# EAGLE board RTC-Module-Panel (EAGLE 7.7.0)
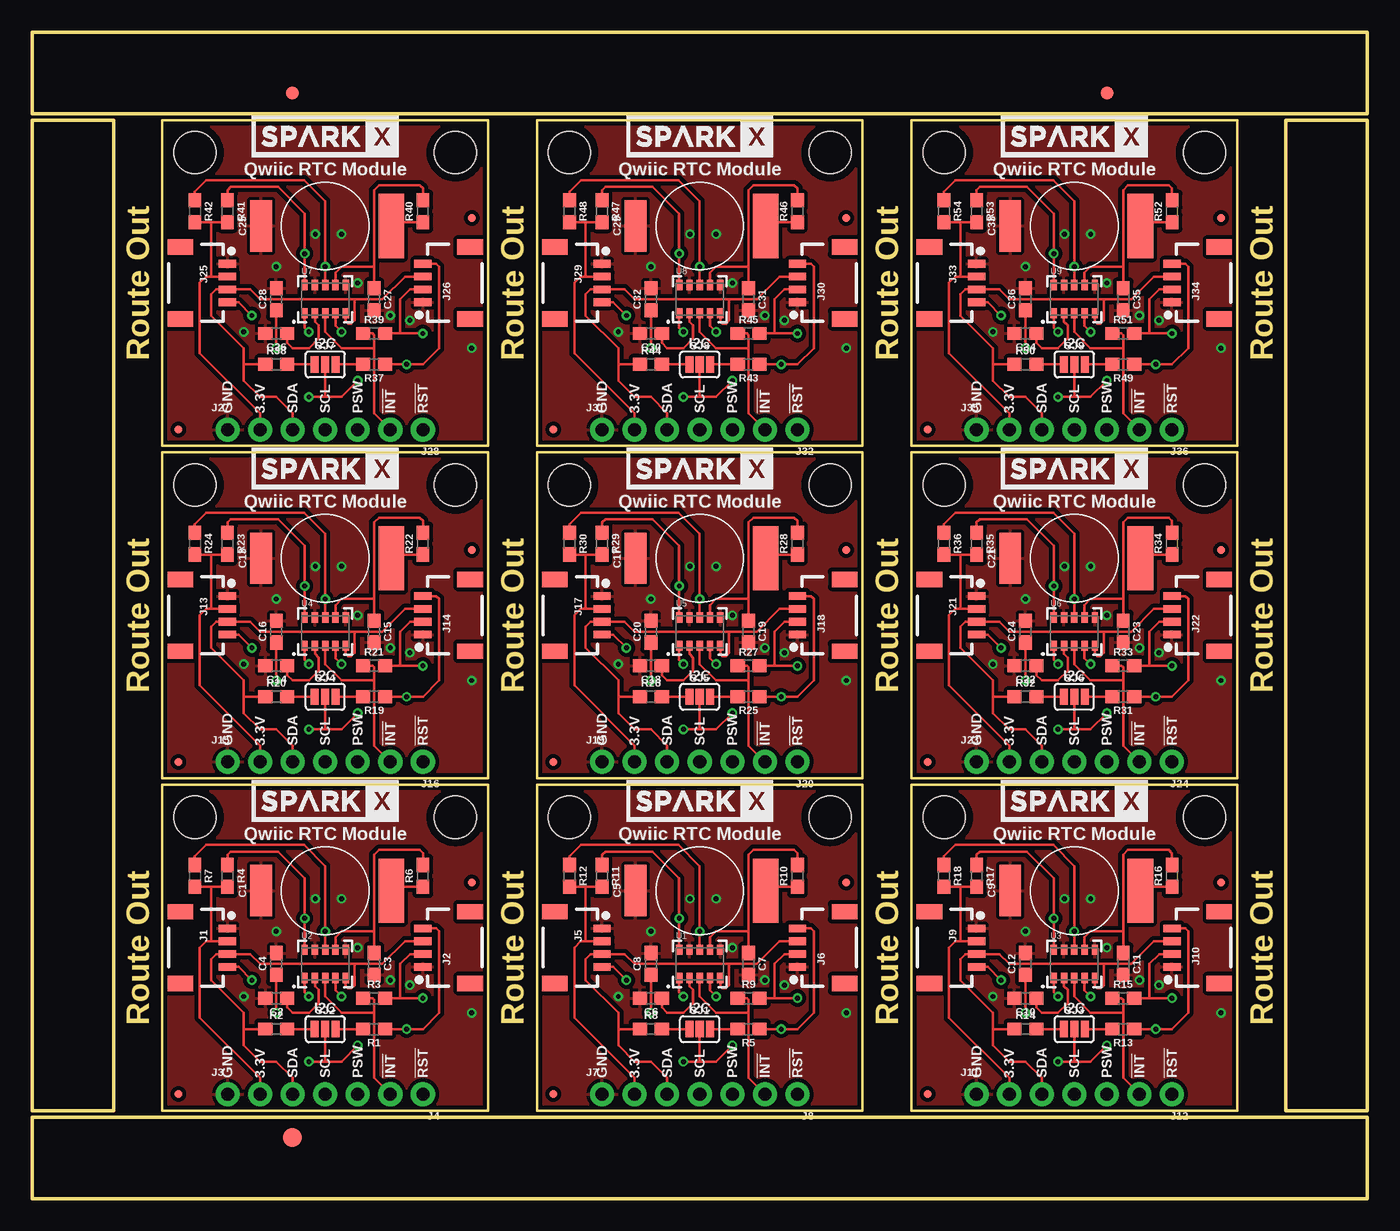
[diagram p0: board, top side]
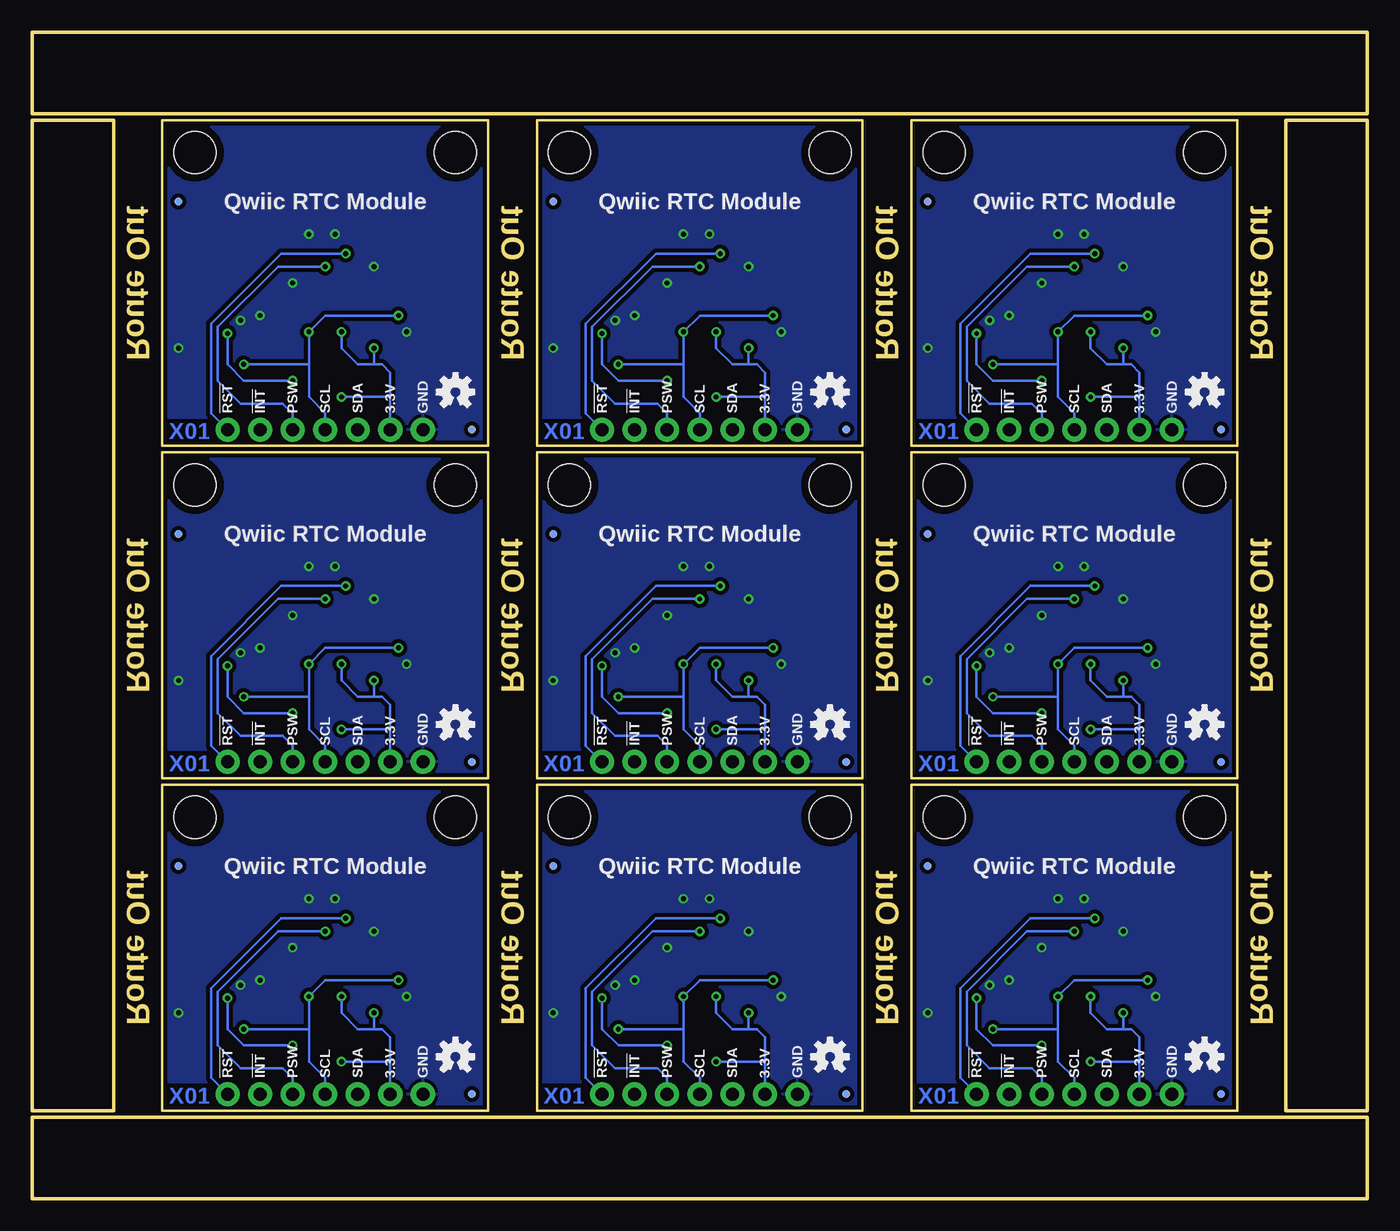
[diagram p1: board, bottom side, seen from below]

Size 104.14 x 90.93 mm. Coordinates in mm from the lower left corner, seen from the top.
Outline: 35.56,32.26 10.16,32.26 10.16,6.86 35.56,6.86 35.56,32.26
Outline: 64.77,32.26 39.37,32.26 39.37,6.86 64.77,6.86 64.77,32.26
Outline: 93.98,32.26 68.58,32.26 68.58,6.86 93.98,6.86 93.98,32.26
Outline: 35.56,58.17 10.16,58.17 10.16,32.77 35.56,32.77 35.56,58.17
Outline: 64.77,58.17 39.37,58.17 39.37,32.77 64.77,32.77 64.77,58.17
Outline: 93.98,58.17 68.58,58.17 68.58,32.77 93.98,32.77 93.98,58.17
Outline: 35.56,84.07 10.16,84.07 10.16,58.67 35.56,58.67 35.56,84.07
Outline: 64.77,84.07 39.37,84.07 39.37,58.67 64.77,58.67 64.77,84.07
Outline: 93.98,84.07 68.58,84.07 68.58,58.67 93.98,58.67 93.98,84.07
Outline: 0,6.35 104.14,6.35 104.14,0 0,0 0,6.35
Outline: 97.79,84.07 104.14,84.07 104.14,6.86 97.79,6.86 97.79,84.07
Outline: 0,90.93 104.14,90.93 104.14,84.58 0,84.58 0,90.93
Outline: 0,84.07 6.35,84.07 6.35,6.86 0,6.86 0,84.07
Copper layers (1*16): Top 0.035mm / dielectric 1.5mm / Bottom 0.035mm
Design rules "SparkFun-2-layer-PCBWay-LIMIT": minimum track width 6mil, minimum drill 0.3mm, track to track 6mil, track to pad 6mil, pad to pad 6mil, via to via 6mil, smd to smd 6mil, copper to edge 6mil, drill to drill 6mil, minimum pad ring 7mil, minimum via ring 7mil, stop-mask expansion 4mil, vias tented up to drill 25mil, thermal gap 10mil

## Footprints (pad centres in the part's own frame; a part is rotated, then mirrored left to right if it is on the bottom)
DSK-RADIAL-6.8MM = smd 5 x 2: + 0,5.15 | smd 4 x 1.7: - 0,-5
0603 = smd 1.1 x 1: 1 -0.85,0; 2 0.85,0
FIDUCIAL-1X2 = smd 1 x 1: 1 0,0
FIDUCIAL-1.5X3 = smd 1.5 x 1.5: 1 0,0
FIDUCIAL-MICRO = smd 0.635 x 0.635: 1 0,0
1X04_1MM_RA = smd 0.6 x 1.35: 1 -1.5,0; 2 -0.5,0; 3 0.5,0; 4 1.5,0 | smd 1.2 x 2: NC1 2.8,-3.675; NC2 -2.8,-3.675
1X04_NO_SILK = drill 1.016 pad 1.88: 1 0,0; 2 2.54,0; 3 5.08,0; 4 7.62,0
1X03_NO_SILK = drill 1.016 pad 1.88: 1 0,0; 2 2.54,0; 3 5.08,0
SMT-JUMPER_3_2-NC_PASTE_SILK = smd 0.635 x 1.27: 1 -0.813,0; 2 0,0; 3 0.813,0
RV-1805 = smd 0.5 x 0.8: 1 -1.6,-1.1; 2 -0.8,-1.1; 3 0,-1.1; 4 0.8,-1.1; 5 1.6,-1.1; 6 1.6,1.1; 7 0.8,1.1; 8 0,1.1; 9 -0.8,1.1; 10 -1.6,1.1 | smd 0 x 0: 11 0,0
STAND-OFF = hole 3.302: 0,0

## Placement (x,y rotation side)
C1  .22F-SUPERCAP  [DSK-RADIAL-6.8MM]  22.86,24 270 top
C2  47pF  [0603]  19.05,15.62 180 top
C3  10nF  [0603]  26.67,18.29 270 top
C4  10nF  [0603]  19.05,18.29 90 top
C5  .22F-SUPERCAP  [DSK-RADIAL-6.8MM]  52.07,24 270 top
C6  47pF  [0603]  48.26,15.62 180 top
C7  10nF  [0603]  55.88,18.29 270 top
C8  10nF  [0603]  48.26,18.29 90 top
C9  .22F-SUPERCAP  [DSK-RADIAL-6.8MM]  81.28,24 270 top
C10  47pF  [0603]  77.47,15.62 180 top
C11  10nF  [0603]  85.09,18.29 270 top
C12  10nF  [0603]  77.47,18.29 90 top
C13  .22F-SUPERCAP  [DSK-RADIAL-6.8MM]  22.86,49.91 270 top
C14  47pF  [0603]  19.05,41.53 180 top
C15  10nF  [0603]  26.67,44.2 270 top
C16  10nF  [0603]  19.05,44.2 90 top
C17  .22F-SUPERCAP  [DSK-RADIAL-6.8MM]  52.07,49.91 270 top
C18  47pF  [0603]  48.26,41.53 180 top
C19  10nF  [0603]  55.88,44.2 270 top
C20  10nF  [0603]  48.26,44.2 90 top
C21  .22F-SUPERCAP  [DSK-RADIAL-6.8MM]  81.28,49.91 270 top
C22  47pF  [0603]  77.47,41.53 180 top
C23  10nF  [0603]  85.09,44.2 270 top
C24  10nF  [0603]  77.47,44.2 90 top
C25  .22F-SUPERCAP  [DSK-RADIAL-6.8MM]  22.86,75.82 270 top
C26  47pF  [0603]  19.05,67.44 180 top
C27  10nF  [0603]  26.67,70.1 270 top
C28  10nF  [0603]  19.05,70.1 90 top
C29  .22F-SUPERCAP  [DSK-RADIAL-6.8MM]  52.07,75.82 270 top
C30  47pF  [0603]  48.26,67.44 180 top
C31  10nF  [0603]  55.88,70.1 270 top
C32  10nF  [0603]  48.26,70.1 90 top
C33  .22F-SUPERCAP  [DSK-RADIAL-6.8MM]  81.28,75.82 270 top
C34  47pF  [0603]  77.47,67.44 180 top
C35  10nF  [0603]  85.09,70.1 270 top
C36  10nF  [0603]  77.47,70.1 90 top
E$1  [FIDUCIAL-1X2]  20.32,86.17 0 top
E$2  [FIDUCIAL-1X2]  83.82,86.17 0 top
E$3  [FIDUCIAL-1.5X3]  20.32,4.76 0 top
FD1  FIDUCIALUFIDUCIAL  [FIDUCIAL-MICRO]  34.29,25.91 0 bottom
FD2  FIDUCIALUFIDUCIAL  [FIDUCIAL-MICRO]  34.29,24.64 0 top
FD3  FIDUCIALUFIDUCIAL  [FIDUCIAL-MICRO]  11.43,8.13 0 bottom
FD4  FIDUCIALUFIDUCIAL  [FIDUCIAL-MICRO]  11.43,8.13 0 top
FD5  FIDUCIALUFIDUCIAL  [FIDUCIAL-MICRO]  63.5,25.91 0 bottom
FD6  FIDUCIALUFIDUCIAL  [FIDUCIAL-MICRO]  63.5,24.64 0 top
FD7  FIDUCIALUFIDUCIAL  [FIDUCIAL-MICRO]  40.64,8.13 0 bottom
FD8  FIDUCIALUFIDUCIAL  [FIDUCIAL-MICRO]  40.64,8.13 0 top
FD9  FIDUCIALUFIDUCIAL  [FIDUCIAL-MICRO]  92.71,25.91 0 bottom
FD10  FIDUCIALUFIDUCIAL  [FIDUCIAL-MICRO]  92.71,24.64 0 top
FD11  FIDUCIALUFIDUCIAL  [FIDUCIAL-MICRO]  69.85,8.13 0 bottom
FD12  FIDUCIALUFIDUCIAL  [FIDUCIAL-MICRO]  69.85,8.13 0 top
FD13  FIDUCIALUFIDUCIAL  [FIDUCIAL-MICRO]  34.29,51.82 0 bottom
FD14  FIDUCIALUFIDUCIAL  [FIDUCIAL-MICRO]  34.29,50.55 0 top
FD15  FIDUCIALUFIDUCIAL  [FIDUCIAL-MICRO]  11.43,34.04 0 bottom
FD16  FIDUCIALUFIDUCIAL  [FIDUCIAL-MICRO]  11.43,34.04 0 top
FD17  FIDUCIALUFIDUCIAL  [FIDUCIAL-MICRO]  63.5,51.82 0 bottom
FD18  FIDUCIALUFIDUCIAL  [FIDUCIAL-MICRO]  63.5,50.55 0 top
FD19  FIDUCIALUFIDUCIAL  [FIDUCIAL-MICRO]  40.64,34.04 0 bottom
FD20  FIDUCIALUFIDUCIAL  [FIDUCIAL-MICRO]  40.64,34.04 0 top
FD21  FIDUCIALUFIDUCIAL  [FIDUCIAL-MICRO]  92.71,51.82 0 bottom
FD22  FIDUCIALUFIDUCIAL  [FIDUCIAL-MICRO]  92.71,50.55 0 top
FD23  FIDUCIALUFIDUCIAL  [FIDUCIAL-MICRO]  69.85,34.04 0 bottom
FD24  FIDUCIALUFIDUCIAL  [FIDUCIAL-MICRO]  69.85,34.04 0 top
FD25  FIDUCIALUFIDUCIAL  [FIDUCIAL-MICRO]  34.29,77.72 0 bottom
FD26  FIDUCIALUFIDUCIAL  [FIDUCIAL-MICRO]  34.29,76.45 0 top
FD27  FIDUCIALUFIDUCIAL  [FIDUCIAL-MICRO]  11.43,59.94 0 bottom
FD28  FIDUCIALUFIDUCIAL  [FIDUCIAL-MICRO]  11.43,59.94 0 top
FD29  FIDUCIALUFIDUCIAL  [FIDUCIAL-MICRO]  63.5,77.72 0 bottom
FD30  FIDUCIALUFIDUCIAL  [FIDUCIAL-MICRO]  63.5,76.45 0 top
FD31  FIDUCIALUFIDUCIAL  [FIDUCIAL-MICRO]  40.64,59.94 0 bottom
FD32  FIDUCIALUFIDUCIAL  [FIDUCIAL-MICRO]  40.64,59.94 0 top
FD33  FIDUCIALUFIDUCIAL  [FIDUCIAL-MICRO]  92.71,77.72 0 bottom
FD34  FIDUCIALUFIDUCIAL  [FIDUCIAL-MICRO]  92.71,76.45 0 top
FD35  FIDUCIALUFIDUCIAL  [FIDUCIAL-MICRO]  69.85,59.94 0 bottom
FD36  FIDUCIALUFIDUCIAL  [FIDUCIAL-MICRO]  69.85,59.94 0 top
J1  SMD  [1X04_1MM_RA]  15.24,19.56 270 top
J2  SMD  [1X04_1MM_RA]  30.48,19.56 90 top
J3  PTH  [1X04_NO_SILK]  15.24,8.13 0 top
J4  [1X03_NO_SILK]  30.48,8.13 180 top
J5  SMD  [1X04_1MM_RA]  44.45,19.56 270 top
J6  SMD  [1X04_1MM_RA]  59.69,19.56 90 top
J7  PTH  [1X04_NO_SILK]  44.45,8.13 0 top
J8  [1X03_NO_SILK]  59.69,8.13 180 top
J9  SMD  [1X04_1MM_RA]  73.66,19.56 270 top
J10  SMD  [1X04_1MM_RA]  88.9,19.56 90 top
J11  PTH  [1X04_NO_SILK]  73.66,8.13 0 top
J12  [1X03_NO_SILK]  88.9,8.13 180 top
J13  SMD  [1X04_1MM_RA]  15.24,45.47 270 top
J14  SMD  [1X04_1MM_RA]  30.48,45.47 90 top
J15  PTH  [1X04_NO_SILK]  15.24,34.04 0 top
J16  [1X03_NO_SILK]  30.48,34.04 180 top
J17  SMD  [1X04_1MM_RA]  44.45,45.47 270 top
J18  SMD  [1X04_1MM_RA]  59.69,45.47 90 top
J19  PTH  [1X04_NO_SILK]  44.45,34.04 0 top
J20  [1X03_NO_SILK]  59.69,34.04 180 top
J21  SMD  [1X04_1MM_RA]  73.66,45.47 270 top
J22  SMD  [1X04_1MM_RA]  88.9,45.47 90 top
J23  PTH  [1X04_NO_SILK]  73.66,34.04 0 top
J24  [1X03_NO_SILK]  88.9,34.04 180 top
J25  SMD  [1X04_1MM_RA]  15.24,71.37 270 top
J26  SMD  [1X04_1MM_RA]  30.48,71.37 90 top
J27  PTH  [1X04_NO_SILK]  15.24,59.94 0 top
J28  [1X03_NO_SILK]  30.48,59.94 180 top
J29  SMD  [1X04_1MM_RA]  44.45,71.37 270 top
J30  SMD  [1X04_1MM_RA]  59.69,71.37 90 top
J31  PTH  [1X04_NO_SILK]  44.45,59.94 0 top
J32  [1X03_NO_SILK]  59.69,59.94 180 top
J33  SMD  [1X04_1MM_RA]  73.66,71.37 270 top
J34  SMD  [1X04_1MM_RA]  88.9,71.37 90 top
J35  PTH  [1X04_NO_SILK]  73.66,59.94 0 top
J36  [1X03_NO_SILK]  88.9,59.94 180 top
LOGO1  OSHW-LOGOS  [OSHW-LOGO-S]  12.7,11.05 0 bottom
LOGO2  OSHW-LOGOS  [OSHW-LOGO-S]  41.91,11.05 0 bottom
LOGO3  OSHW-LOGOS  [OSHW-LOGO-S]  71.12,11.05 0 bottom
LOGO4  OSHW-LOGOS  [OSHW-LOGO-S]  12.7,36.96 0 bottom
LOGO5  OSHW-LOGOS  [OSHW-LOGO-S]  41.91,36.96 0 bottom
LOGO6  OSHW-LOGOS  [OSHW-LOGO-S]  71.12,36.96 0 bottom
LOGO7  OSHW-LOGOS  [OSHW-LOGO-S]  12.7,62.86 0 bottom
LOGO8  OSHW-LOGOS  [OSHW-LOGO-S]  41.91,62.86 0 bottom
LOGO9  OSHW-LOGOS  [OSHW-LOGO-S]  71.12,62.86 0 bottom
R1  2.2k  [0603]  26.67,13.21 180 top
R2  2.2k  [0603]  19.05,13.21 0 top
R3  10k  [0603]  26.67,15.62 0 top
R4  10k  [0603]  15.24,25.15 270 top
R5  2.2k  [0603]  55.88,13.21 180 top
R6  1K  [0603]  30.48,25.15 90 top
R7  10k  [0603]  12.7,25.15 270 top
R8  2.2k  [0603]  48.26,13.21 0 top
R9  10k  [0603]  55.88,15.62 0 top
R10  1K  [0603]  59.69,25.15 90 top
R11  10k  [0603]  44.45,25.15 270 top
R12  10k  [0603]  41.91,25.15 270 top
R13  2.2k  [0603]  85.09,13.21 180 top
R14  2.2k  [0603]  77.47,13.21 0 top
R15  10k  [0603]  85.09,15.62 0 top
R16  1K  [0603]  88.9,25.15 90 top
R17  10k  [0603]  73.66,25.15 270 top
R18  10k  [0603]  71.12,25.15 270 top
R19  2.2k  [0603]  26.67,39.12 180 top
R20  2.2k  [0603]  19.05,39.12 0 top
R21  10k  [0603]  26.67,41.53 0 top
R22  1K  [0603]  30.48,51.05 90 top
R23  10k  [0603]  15.24,51.05 270 top
R24  10k  [0603]  12.7,51.05 270 top
R25  2.2k  [0603]  55.88,39.12 180 top
R26  2.2k  [0603]  48.26,39.12 0 top
R27  10k  [0603]  55.88,41.53 0 top
R28  1K  [0603]  59.69,51.05 90 top
R29  10k  [0603]  44.45,51.05 270 top
R30  10k  [0603]  41.91,51.05 270 top
R31  2.2k  [0603]  85.09,39.12 180 top
R32  2.2k  [0603]  77.47,39.12 0 top
R33  10k  [0603]  85.09,41.53 0 top
R34  1K  [0603]  88.9,51.05 90 top
R35  10k  [0603]  73.66,51.05 270 top
R36  10k  [0603]  71.12,51.05 270 top
R37  2.2k  [0603]  26.67,65.02 180 top
R38  2.2k  [0603]  19.05,65.02 0 top
R39  10k  [0603]  26.67,67.44 0 top
R40  1K  [0603]  30.48,76.96 90 top
R41  10k  [0603]  15.24,76.96 270 top
R42  10k  [0603]  12.7,76.96 270 top
R43  2.2k  [0603]  55.88,65.02 180 top
R44  2.2k  [0603]  48.26,65.02 0 top
R45  10k  [0603]  55.88,67.44 0 top
R46  1K  [0603]  59.69,76.96 90 top
R47  10k  [0603]  44.45,76.96 270 top
R48  10k  [0603]  41.91,76.96 270 top
R49  2.2k  [0603]  85.09,65.02 180 top
R50  2.2k  [0603]  77.47,65.02 0 top
R51  10k  [0603]  85.09,67.44 0 top
R52  1K  [0603]  88.9,76.96 90 top
R53  10k  [0603]  73.66,76.96 270 top
R54  10k  [0603]  71.12,76.96 270 top
SJ1  JUMPER-SMT_3_2-NC_PASTE_SILK  [SMT-JUMPER_3_2-NC_PASTE_SILK]  52.07,13.21 0 top
SJ2  JUMPER-SMT_3_2-NC_PASTE_SILK  [SMT-JUMPER_3_2-NC_PASTE_SILK]  22.86,13.21 0 top
SJ3  JUMPER-SMT_3_2-NC_PASTE_SILK  [SMT-JUMPER_3_2-NC_PASTE_SILK]  81.28,13.21 0 top
SJ4  JUMPER-SMT_3_2-NC_PASTE_SILK  [SMT-JUMPER_3_2-NC_PASTE_SILK]  22.86,39.12 0 top
SJ5  JUMPER-SMT_3_2-NC_PASTE_SILK  [SMT-JUMPER_3_2-NC_PASTE_SILK]  52.07,39.12 0 top
SJ6  JUMPER-SMT_3_2-NC_PASTE_SILK  [SMT-JUMPER_3_2-NC_PASTE_SILK]  81.28,39.12 0 top
SJ7  JUMPER-SMT_3_2-NC_PASTE_SILK  [SMT-JUMPER_3_2-NC_PASTE_SILK]  22.86,65.02 0 top
SJ8  JUMPER-SMT_3_2-NC_PASTE_SILK  [SMT-JUMPER_3_2-NC_PASTE_SILK]  52.07,65.02 0 top
SJ9  JUMPER-SMT_3_2-NC_PASTE_SILK  [SMT-JUMPER_3_2-NC_PASTE_SILK]  81.28,65.02 0 top
U1  RV-1805  [RV-1805]  52.07,18.29 0 top
U2  RV-1805  [RV-1805]  22.86,18.29 0 top
U3  RV-1805  [RV-1805]  81.28,18.29 0 top
U4  RV-1805  [RV-1805]  22.86,44.2 0 top
U5  RV-1805  [RV-1805]  52.07,44.2 0 top
U6  RV-1805  [RV-1805]  81.28,44.2 0 top
U7  RV-1805  [RV-1805]  22.86,70.1 0 top
U8  RV-1805  [RV-1805]  52.07,70.1 0 top
U9  RV-1805  [RV-1805]  81.28,70.1 0 top
U$1  SPARKX-LOGO5  [SPARKX-LARGE]  22.86,30.99 0 top
U$2  STAND-OFF  [STAND-OFF]  62.23,29.72 180 top
U$3  STAND-OFF  [STAND-OFF]  41.91,29.72 180 top
U$4  SPARKX-LOGO5  [SPARKX-LARGE]  52.07,30.99 0 top
U$5  STAND-OFF  [STAND-OFF]  91.44,29.72 180 top
U$6  STAND-OFF  [STAND-OFF]  33.02,29.72 180 top
U$7  STAND-OFF  [STAND-OFF]  12.7,29.72 180 top
U$8  STAND-OFF  [STAND-OFF]  71.12,29.72 180 top
U$9  SPARKX-LOGO5  [SPARKX-LARGE]  81.28,30.99 0 top
U$10  STAND-OFF  [STAND-OFF]  33.02,55.63 180 top
U$11  STAND-OFF  [STAND-OFF]  12.7,55.63 180 top
U$12  SPARKX-LOGO5  [SPARKX-LARGE]  22.86,56.9 0 top
U$13  STAND-OFF  [STAND-OFF]  62.23,55.63 180 top
U$14  STAND-OFF  [STAND-OFF]  41.91,55.63 180 top
U$15  SPARKX-LOGO5  [SPARKX-LARGE]  52.07,56.9 0 top
U$16  STAND-OFF  [STAND-OFF]  91.44,55.63 180 top
U$17  STAND-OFF  [STAND-OFF]  71.12,55.63 180 top
U$18  SPARKX-LOGO5  [SPARKX-LARGE]  81.28,56.9 0 top
U$19  STAND-OFF  [STAND-OFF]  33.02,81.53 180 top
U$20  STAND-OFF  [STAND-OFF]  12.7,81.53 180 top
U$21  SPARKX-LOGO5  [SPARKX-LARGE]  22.86,82.8 0 top
U$22  STAND-OFF  [STAND-OFF]  62.23,81.53 180 top
U$23  STAND-OFF  [STAND-OFF]  41.91,81.53 180 top
U$24  SPARKX-LOGO5  [SPARKX-LARGE]  52.07,82.8 0 top
U$25  STAND-OFF  [STAND-OFF]  91.44,81.53 180 top
U$26  STAND-OFF  [STAND-OFF]  71.12,81.53 180 top
U$27  SPARKX-LOGO5  [SPARKX-LARGE]  81.28,82.8 0 top

## Library data of the parts
C1 C5 C9 C13 C17 C21 C25 C29 C33 = SparkFun-Capacitors; PROD_ID: CAP-13907
C2 C6 C10 C14 C18 C22 C26 C30 C34 = SparkFun-Capacitors; PROD_ID: CAP-08913
C3 C4 C7 C8 C11 C12 C15 C16 C19 C20 C23 C24 C27 C28 C31 C32 C35 C36 = SparkFun-Capacitors; PROD_ID: CAP-00867
E$1 E$2 FD1-FD36 LOGO1-LOGO9 = SparkFun-Aesthetics
E$3 = SparkFun-Retired
J1 J2 J5 J6 J9 J10 J13 J14 J17 J18 J21 J22 J25 J26 J29 J30 J33 J34 = SparkFun-Connectors; PROD_ID: CONN-13694
J3 J7 J11 J15 J19 J23 J27 J31 J35 = SparkFun-Connectors; PROD_ID: CONN-09696
J4 J8 J12 J16 J20 J24 J28 J32 J36 = SparkFun-Connectors
R1 R2 R5 R8 R13 R14 R19 R20 R25 R26 R31 R32 R37 R38 R43 R44 R49 R50 = SparkFun-Resistors; PROD_ID: RES-08272
R3 R4 R7 R9 R11 R12 R15 R17 R18 R21 R23 R24 R27 R29 R30 R33 R35 R36 R39 R41 R42 R45 R47 R48 R51 R53 R54 = SparkFun-Resistors; PROD_ID: RES-00824
R6 R10 R16 R22 R28 R34 R40 R46 R52 = SparkFun-Resistors; PROD_ID: RES-11227
SJ1-SJ9 = SparkFun-Jumpers
U1-U9 = SparkFun-Clocks
U$1 U$4 U$9 U$12 U$15 U$18 U$21 U$24 U$27 = SparkX
U$2 U$3 U$5-U$8 U$10 U$11 U$13 U$14 U$16 U$17 U$19 U$20 U$22 U$23 U$25 U$26 = SparkFun

## Nets
3.3V: C4.1 J1.2 J2.2 J3.2 R3.2 R4.2 R7.2 SJ2.2 U2.1
3.3V1: C8.1 J5.2 J6.2 J7.2 R9.2 R11.2 R12.2 SJ1.2 U1.1
3.3V2: C12.1 J9.2 J10.2 J11.2 R15.2 R17.2 R18.2 SJ3.2 U3.1
3.3V3: C16.1 J13.2 J14.2 J15.2 R21.2 R23.2 R24.2 SJ4.2 U4.1
3.3V4: C20.1 J17.2 J18.2 J19.2 R27.2 R29.2 R30.2 SJ5.2 U5.1
3.3V5: C24.1 J21.2 J22.2 J23.2 R33.2 R35.2 R36.2 SJ6.2 U6.1
3.3V6: C28.1 J25.2 J26.2 J27.2 R39.2 R41.2 R42.2 SJ7.2 U7.1
3.3V7: C32.1 J29.2 J30.2 J31.2 R45.2 R47.2 R48.2 SJ8.2 U8.1
3.3V8: C36.1 J33.2 J34.2 J35.2 R51.2 R53.2 R54.2 SJ9.2 U9.1
!INT: J4.2 R3.1 U2.3
!INT1: J8.2 R9.1 U1.3
!INT2: J12.2 R15.1 U3.3
!INT3: J16.2 R21.1 U4.3
!INT4: J20.2 R27.1 U5.3
!INT5: J24.2 R33.1 U6.3
!INT6: J28.2 R39.1 U7.3
!INT7: J32.2 R45.1 U8.3
!INT8: J36.2 R51.1 U9.3
!RST: J4.1 R4.1 U2.10
!RST1: J8.1 R11.1 U1.10
!RST2: J12.1 R17.1 U3.10
!RST3: J16.1 R23.1 U4.10
!RST4: J20.1 R29.1 U5.10
!RST5: J24.1 R35.1 U6.10
!RST6: J28.1 R41.1 U7.10
!RST7: J32.1 R47.1 U8.10
!RST8: J36.1 R53.1 U9.10
GND: C1.- C2.2 C3.2 C4.2 J1.1 J2.1 J3.1 U2.6 U2.9
GND1: C5.- C6.2 C7.2 C8.2 J5.1 J6.1 J7.1 U1.6 U1.9
GND2: C9.- C10.2 C11.2 C12.2 J9.1 J10.1 J11.1 U3.6 U3.9
GND3: C13.- C14.2 C15.2 C16.2 J13.1 J14.1 J15.1 U4.6 U4.9
GND4: C17.- C18.2 C19.2 C20.2 J17.1 J18.1 J19.1 U5.6 U5.9
GND5: C21.- C22.2 C23.2 C24.2 J21.1 J22.1 J23.1 U6.6 U6.9
GND6: C25.- C26.2 C27.2 C28.2 J25.1 J26.1 J27.1 U7.6 U7.9
GND7: C29.- C30.2 C31.2 C32.2 J29.1 J30.1 J31.1 U8.6 U8.9
GND8: C33.- C34.2 C35.2 C36.2 J33.1 J34.1 J35.1 U9.6 U9.9
N$1: R1.2 SJ2.3
N$2: R2.2 SJ2.1
N$3: R5.2 SJ1.3
N$4: C2.1 U2.2
N$5: C1.+ R6.1
N$6: R8.2 SJ1.1
N$7: C6.1 U1.2
N$8: C5.+ R10.1
N$9: R13.2 SJ3.3
N$10: R14.2 SJ3.1
N$11: C10.1 U3.2
N$12: C9.+ R16.1
N$13: R19.2 SJ4.3
N$14: R20.2 SJ4.1
N$15: C14.1 U4.2
N$16: C13.+ R22.1
N$17: R25.2 SJ5.3
N$18: R26.2 SJ5.1
N$19: C18.1 U5.2
N$20: C17.+ R28.1
N$21: R31.2 SJ6.3
N$22: R32.2 SJ6.1
N$23: C22.1 U6.2
N$24: C21.+ R34.1
N$25: R37.2 SJ7.3
N$26: R38.2 SJ7.1
N$27: C26.1 U7.2
N$28: C25.+ R40.1
N$29: R43.2 SJ8.3
N$30: R44.2 SJ8.1
N$31: C30.1 U8.2
N$32: C29.+ R46.1
N$33: R49.2 SJ9.3
N$34: R50.2 SJ9.1
N$35: C34.1 U9.2
N$36: C33.+ R52.1
PSW: J4.3 R7.1 U2.8
PSW1: J8.3 R12.1 U1.8
PSW2: J12.3 R18.1 U3.8
PSW3: J16.3 R24.1 U4.8
PSW4: J20.3 R30.1 U5.8
PSW5: J24.3 R36.1 U6.8
PSW6: J28.3 R42.1 U7.8
PSW7: J32.3 R48.1 U8.8
PSW8: J36.3 R54.1 U9.8
SCL: J1.4 J2.4 J3.4 R1.1 U2.4
SCL1: J5.4 J6.4 J7.4 R5.1 U1.4
SCL2: J9.4 J10.4 J11.4 R13.1 U3.4
SCL3: J13.4 J14.4 J15.4 R19.1 U4.4
SCL4: J17.4 J18.4 J19.4 R25.1 U5.4
SCL5: J21.4 J22.4 J23.4 R31.1 U6.4
SCL6: J25.4 J26.4 J27.4 R37.1 U7.4
SCL7: J29.4 J30.4 J31.4 R43.1 U8.4
SCL8: J33.4 J34.4 J35.4 R49.1 U9.4
SDA: J1.3 J2.3 J3.3 R2.1 U2.5
SDA1: J5.3 J6.3 J7.3 R8.1 U1.5
SDA2: J9.3 J10.3 J11.3 R14.1 U3.5
SDA3: J13.3 J14.3 J15.3 R20.1 U4.5
SDA4: J17.3 J18.3 J19.3 R26.1 U5.5
SDA5: J21.3 J22.3 J23.3 R32.1 U6.5
SDA6: J25.3 J26.3 J27.3 R38.1 U7.5
SDA7: J29.3 J30.3 J31.3 R44.1 U8.5
SDA8: J33.3 J34.3 J35.3 R50.1 U9.5
VBACKUP: C3.1 R6.2 U2.7
VBACKUP1: C7.1 R10.2 U1.7
VBACKUP2: C11.1 R16.2 U3.7
VBACKUP3: C15.1 R22.2 U4.7
VBACKUP4: C19.1 R28.2 U5.7
VBACKUP5: C23.1 R34.2 U6.7
VBACKUP6: C27.1 R40.2 U7.7
VBACKUP7: C31.1 R46.2 U8.7
VBACKUP8: C35.1 R52.2 U9.7

## Tracks (layer width: path | path; a pad name or v marks a point on that pad's centre or on a via)
3.3V  (via drill 0.38)
  Top 0.203: U2.1 21.26,16.08 v21.59,15.75 | J2.2 29.47,19.06 28.7,18.29 28.7,15.62 | R7.2 13.97,24.3 | 13.97,24.3 R4.2 | J1.2 13.97,20.06 | 13.97,20.06 13.58,20.06 13.08,19.56 13.08,14.1 17.78,9.4 J3.2 | 13.97,20.06 13.97,24.3 | SJ2.2 22.86,10.67 | R3.2 28.7,15.62 | 28.7,15.62 v30.48,15.62 | C4.1 v19.05,14.48 | 22.86,10.67 v21.59,10.67 | 22.86,10.67 24.13,10.67 v25.4,11.94
  Bottom 0.203: J3.2 17.78,10.67 | 17.78,10.67 17.78,12.57 18.41,13.21 19.05,13.21 | 19.05,13.21 20.32,13.21 21.59,14.48 v21.59,15.75 | v21.59,10.67 17.78,10.67 | v25.4,11.94 29.21,11.94 30.48,13.21 v30.48,15.62 | v19.05,14.48 19.05,13.21
3.3V1  (via drill 0.38)
  Top 0.203: U1.1 50.47,16.08 v50.8,15.75 | J6.2 58.68,19.06 57.91,18.29 57.91,15.62 | R12.2 43.18,24.3 | 43.18,24.3 R11.2 | J5.2 43.18,20.06 | 43.18,20.06 42.79,20.06 42.29,19.56 42.29,14.1 46.99,9.4 J7.2 | 43.18,20.06 43.18,24.3 | SJ1.2 52.07,10.67 | R9.2 57.91,15.62 | 57.91,15.62 v59.69,15.62 | C8.1 v48.26,14.48 | 52.07,10.67 v50.8,10.67 | 52.07,10.67 53.34,10.67 v54.61,11.94
  Bottom 0.203: J7.2 46.99,10.67 | 46.99,10.67 46.99,12.57 47.62,13.21 48.26,13.21 | 48.26,13.21 49.53,13.21 50.8,14.48 v50.8,15.75 | v50.8,10.67 46.99,10.67 | v54.61,11.94 58.42,11.94 59.69,13.21 v59.69,15.62 | v48.26,14.48 48.26,13.21
3.3V2  (via drill 0.38)
  Top 0.203: U3.1 79.68,16.08 v80.01,15.75 | J10.2 87.89,19.06 87.12,18.29 87.12,15.62 | R18.2 72.39,24.3 | 72.39,24.3 R17.2 | J9.2 72.39,20.06 | 72.39,20.06 72,20.06 71.5,19.56 71.5,14.1 76.2,9.4 J11.2 | 72.39,20.06 72.39,24.3 | SJ3.2 81.28,10.67 | R15.2 87.12,15.62 | 87.12,15.62 v88.9,15.62 | C12.1 v77.47,14.48 | 81.28,10.67 v80.01,10.67 | 81.28,10.67 82.55,10.67 v83.82,11.94
  Bottom 0.203: J11.2 76.2,10.67 | 76.2,10.67 76.2,12.57 76.83,13.21 77.47,13.21 | 77.47,13.21 78.74,13.21 80.01,14.48 v80.01,15.75 | v80.01,10.67 76.2,10.67 | v83.82,11.94 87.63,11.94 88.9,13.21 v88.9,15.62 | v77.47,14.48 77.47,13.21
3.3V3  (via drill 0.38)
  Top 0.203: U4.1 21.26,41.99 v21.59,41.66 | J14.2 29.47,44.97 28.7,44.2 28.7,41.53 | R24.2 13.97,50.2 | 13.97,50.2 R23.2 | J13.2 13.97,45.97 | 13.97,45.97 13.58,45.97 13.08,45.47 13.08,40 17.78,35.31 J15.2 | 13.97,45.97 13.97,50.2 | SJ4.2 22.86,36.58 | R21.2 28.7,41.53 | 28.7,41.53 v30.48,41.53 | C16.1 v19.05,40.39 | 22.86,36.58 v21.59,36.58 | 22.86,36.58 24.13,36.58 v25.4,37.85
  Bottom 0.203: J15.2 17.78,36.58 | 17.78,36.58 17.78,38.48 18.41,39.12 19.05,39.12 | 19.05,39.12 20.32,39.12 21.59,40.39 v21.59,41.66 | v21.59,36.58 17.78,36.58 | v25.4,37.85 29.21,37.85 30.48,39.12 v30.48,41.53 | v19.05,40.39 19.05,39.12
3.3V4  (via drill 0.38)
  Top 0.203: U5.1 50.47,41.99 v50.8,41.66 | J18.2 58.68,44.97 57.91,44.2 57.91,41.53 | R30.2 43.18,50.2 | 43.18,50.2 R29.2 | J17.2 43.18,45.97 | 43.18,45.97 42.79,45.97 42.29,45.47 42.29,40 46.99,35.31 J19.2 | 43.18,45.97 43.18,50.2 | SJ5.2 52.07,36.58 | R27.2 57.91,41.53 | 57.91,41.53 v59.69,41.53 | C20.1 v48.26,40.39 | 52.07,36.58 v50.8,36.58 | 52.07,36.58 53.34,36.58 v54.61,37.85
  Bottom 0.203: J19.2 46.99,36.58 | 46.99,36.58 46.99,38.48 47.62,39.12 48.26,39.12 | 48.26,39.12 49.53,39.12 50.8,40.39 v50.8,41.66 | v50.8,36.58 46.99,36.58 | v54.61,37.85 58.42,37.85 59.69,39.12 v59.69,41.53 | v48.26,40.39 48.26,39.12
3.3V5  (via drill 0.38)
  Top 0.203: U6.1 79.68,41.99 v80.01,41.66 | J22.2 87.89,44.97 87.12,44.2 87.12,41.53 | R36.2 72.39,50.2 | 72.39,50.2 R35.2 | J21.2 72.39,45.97 | 72.39,45.97 72,45.97 71.5,45.47 71.5,40 76.2,35.31 J23.2 | 72.39,45.97 72.39,50.2 | SJ6.2 81.28,36.58 | R33.2 87.12,41.53 | 87.12,41.53 v88.9,41.53 | C24.1 v77.47,40.39 | 81.28,36.58 v80.01,36.58 | 81.28,36.58 82.55,36.58 v83.82,37.85
  Bottom 0.203: J23.2 76.2,36.58 | 76.2,36.58 76.2,38.48 76.83,39.12 77.47,39.12 | 77.47,39.12 78.74,39.12 80.01,40.39 v80.01,41.66 | v80.01,36.58 76.2,36.58 | v83.82,37.85 87.63,37.85 88.9,39.12 v88.9,41.53 | v77.47,40.39 77.47,39.12
3.3V6  (via drill 0.38)
  Top 0.203: U7.1 21.26,67.89 v21.59,67.56 | J26.2 29.47,70.87 28.7,70.1 28.7,67.44 | R42.2 13.97,76.11 | 13.97,76.11 R41.2 | J25.2 13.97,71.87 | 13.97,71.87 13.58,71.87 13.08,71.37 13.08,65.91 17.78,61.21 J27.2 | 13.97,71.87 13.97,76.11 | SJ7.2 22.86,62.48 | R39.2 28.7,67.44 | 28.7,67.44 v30.48,67.44 | C28.1 v19.05,66.29 | 22.86,62.48 v21.59,62.48 | 22.86,62.48 24.13,62.48 v25.4,63.75
  Bottom 0.203: J27.2 17.78,62.48 | 17.78,62.48 17.78,64.39 18.41,65.02 19.05,65.02 | 19.05,65.02 20.32,65.02 21.59,66.29 v21.59,67.56 | v21.59,62.48 17.78,62.48 | v25.4,63.75 29.21,63.75 30.48,65.02 v30.48,67.44 | v19.05,66.29 19.05,65.02
3.3V7  (via drill 0.38)
  Top 0.203: U8.1 50.47,67.89 v50.8,67.56 | J30.2 58.68,70.87 57.91,70.1 57.91,67.44 | R48.2 43.18,76.11 | 43.18,76.11 R47.2 | J29.2 43.18,71.87 | 43.18,71.87 42.79,71.87 42.29,71.37 42.29,65.91 46.99,61.21 J31.2 | 43.18,71.87 43.18,76.11 | SJ8.2 52.07,62.48 | R45.2 57.91,67.44 | 57.91,67.44 v59.69,67.44 | C32.1 v48.26,66.29 | 52.07,62.48 v50.8,62.48 | 52.07,62.48 53.34,62.48 v54.61,63.75
  Bottom 0.203: J31.2 46.99,62.48 | 46.99,62.48 46.99,64.39 47.62,65.02 48.26,65.02 | 48.26,65.02 49.53,65.02 50.8,66.29 v50.8,67.56 | v50.8,62.48 46.99,62.48 | v54.61,63.75 58.42,63.75 59.69,65.02 v59.69,67.44 | v48.26,66.29 48.26,65.02
3.3V8  (via drill 0.38)
  Top 0.203: U9.1 79.68,67.89 v80.01,67.56 | J34.2 87.89,70.87 87.12,70.1 87.12,67.44 | R54.2 72.39,76.11 | 72.39,76.11 R53.2 | J33.2 72.39,71.87 | 72.39,71.87 72,71.87 71.5,71.37 71.5,65.91 76.2,61.21 J35.2 | 72.39,71.87 72.39,76.11 | SJ9.2 81.28,62.48 | R51.2 87.12,67.44 | 87.12,67.44 v88.9,67.44 | C36.1 v77.47,66.29 | 81.28,62.48 v80.01,62.48 | 81.28,62.48 82.55,62.48 v83.82,63.75
  Bottom 0.203: J35.2 76.2,62.48 | 76.2,62.48 76.2,64.39 76.83,65.02 77.47,65.02 | 77.47,65.02 78.74,65.02 80.01,66.29 v80.01,67.56 | v80.01,62.48 76.2,62.48 | v83.82,63.75 87.63,63.75 88.9,65.02 v88.9,67.44 | v77.47,66.29 77.47,65.02
!INT
  Top 0.203: U2.3 22.86,15.75 24.13,14.48 26.67,14.48 | J4.2 26.67,9.4 26.67,14.48 | 26.67,14.48 26.67,15.49 26.54,15.62 R3.1
!INT1
  Top 0.203: U1.3 52.07,15.75 53.34,14.48 55.88,14.48 | J8.2 55.88,9.4 55.88,14.48 | 55.88,14.48 55.88,15.49 55.75,15.62 R9.1
!INT2
  Top 0.203: U3.3 81.28,15.75 82.55,14.48 85.09,14.48 | J12.2 85.09,9.4 85.09,14.48 | 85.09,14.48 85.09,15.49 84.96,15.62 R15.1
!INT3
  Top 0.203: U4.3 22.86,41.66 24.13,40.39 26.67,40.39 | J16.2 26.67,35.31 26.67,40.39 | 26.67,40.39 26.67,41.4 26.54,41.53 R21.1
!INT4
  Top 0.203: U5.3 52.07,41.66 53.34,40.39 55.88,40.39 | J20.2 55.88,35.31 55.88,40.39 | 55.88,40.39 55.88,41.4 55.75,41.53 R27.1
!INT5
  Top 0.203: U6.3 81.28,41.66 82.55,40.39 85.09,40.39 | J24.2 85.09,35.31 85.09,40.39 | 85.09,40.39 85.09,41.4 84.96,41.53 R33.1
!INT6
  Top 0.203: U7.3 22.86,67.56 24.13,66.29 26.67,66.29 | J28.2 26.67,61.21 26.67,66.29 | 26.67,66.29 26.67,67.31 26.54,67.44 R39.1
!INT7
  Top 0.203: U8.3 52.07,67.56 53.34,66.29 55.88,66.29 | J32.2 55.88,61.21 55.88,66.29 | 55.88,66.29 55.88,67.31 55.75,67.44 R45.1
!INT8
  Top 0.203: U9.3 81.28,67.56 82.55,66.29 85.09,66.29 | J36.2 85.09,61.21 85.09,66.29 | 85.09,66.29 85.09,67.31 84.96,67.44 R51.1
!RST  (via drill 0.38)
  Top 0.203: R4.1 15.24,26.8 15.49,27.05 19.18,27.05 21.26,24.97 v21.26,21.84 U2.10
  Bottom 0.203: J4.1 31.75,9.4 31.75,16.38 26.29,21.84 v21.26,21.84
!RST1  (via drill 0.38)
  Top 0.203: R11.1 44.45,26.8 44.7,27.05 48.39,27.05 50.47,24.97 v50.47,21.84 U1.10
  Bottom 0.203: J8.1 60.96,9.4 60.96,16.38 55.5,21.84 v50.47,21.84
!RST2  (via drill 0.38)
  Top 0.203: R17.1 73.66,26.8 73.91,27.05 77.6,27.05 79.68,24.97 v79.68,21.84 U3.10
  Bottom 0.203: J12.1 90.17,9.4 90.17,16.38 84.71,21.84 v79.68,21.84
!RST3  (via drill 0.38)
  Top 0.203: R23.1 15.24,52.7 15.49,52.96 19.18,52.96 21.26,50.88 v21.26,47.75 U4.10
  Bottom 0.203: J16.1 31.75,35.31 31.75,42.29 26.29,47.75 v21.26,47.75
!RST4  (via drill 0.38)
  Top 0.203: R29.1 44.45,52.7 44.7,52.96 48.39,52.96 50.47,50.88 v50.47,47.75 U5.10
  Bottom 0.203: J20.1 60.96,35.31 60.96,42.29 55.5,47.75 v50.47,47.75
!RST5  (via drill 0.38)
  Top 0.203: R35.1 73.66,52.7 73.91,52.96 77.6,52.96 79.68,50.88 v79.68,47.75 U6.10
  Bottom 0.203: J24.1 90.17,35.31 90.17,42.29 84.71,47.75 v79.68,47.75
!RST6  (via drill 0.38)
  Top 0.203: R41.1 15.24,78.61 15.49,78.87 19.18,78.87 21.26,76.78 v21.26,73.66 U7.10
  Bottom 0.203: J28.1 31.75,61.21 31.75,68.2 26.29,73.66 v21.26,73.66
!RST7  (via drill 0.38)
  Top 0.203: R47.1 44.45,78.61 44.7,78.87 48.39,78.87 50.47,76.78 v50.47,73.66 U8.10
  Bottom 0.203: J32.1 60.96,61.21 60.96,68.2 55.5,73.66 v50.47,73.66
!RST8  (via drill 0.38)
  Top 0.203: R53.1 73.66,78.61 73.91,78.87 77.6,78.87 79.68,76.78 v79.68,73.66 U9.10
  Bottom 0.203: J36.1 90.17,61.21 90.17,68.2 84.71,73.66 v79.68,73.66
GND  (via drill 0.38)
  other vias: 19.05,20.83 16.51,15.75 25.4,19.56 27.94,17.02 22.1,23.37 29.46,16.64 24.13,23.37 34.29,14.48
  pour Top (isolate 0.305): 10.16,32.26 35.56,32.26 35.56,6.86 10.16,6.86
  pour Bottom (isolate 0.305): 35.56,32.26 10.16,32.26 10.16,6.86 35.56,6.86
GND1  (via drill 0.38)
  other vias: 48.26,20.83 45.72,15.75 54.61,19.56 57.15,17.02 51.31,23.37 58.67,16.64 53.34,23.37 63.5,14.48
  pour Top (isolate 0.305): 39.37,32.26 64.77,32.26 64.77,6.86 39.37,6.86
  pour Bottom (isolate 0.305): 64.77,32.26 39.37,32.26 39.37,6.86 64.77,6.86
GND2  (via drill 0.38)
  other vias: 77.47,20.83 74.93,15.75 83.82,19.56 86.36,17.02 80.52,23.37 87.88,16.64 82.55,23.37 92.71,14.48
  pour Top (isolate 0.305): 68.58,32.26 93.98,32.26 93.98,6.86 68.58,6.86
  pour Bottom (isolate 0.305): 93.98,32.26 68.58,32.26 68.58,6.86 93.98,6.86
GND3  (via drill 0.38)
  other vias: 19.05,46.74 16.51,41.66 25.4,45.47 27.94,42.93 22.1,49.28 29.46,42.54 24.13,49.28 34.29,40.39
  pour Top (isolate 0.305): 10.16,58.17 35.56,58.17 35.56,32.77 10.16,32.77
  pour Bottom (isolate 0.305): 35.56,58.17 10.16,58.17 10.16,32.77 35.56,32.77
GND4  (via drill 0.38)
  other vias: 48.26,46.74 45.72,41.66 54.61,45.47 57.15,42.93 51.31,49.28 58.67,42.54 53.34,49.28 63.5,40.39
  pour Top (isolate 0.305): 39.37,58.17 64.77,58.17 64.77,32.77 39.37,32.77
  pour Bottom (isolate 0.305): 64.77,58.17 39.37,58.17 39.37,32.77 64.77,32.77
GND5  (via drill 0.38)
  other vias: 77.47,46.74 74.93,41.66 83.82,45.47 86.36,42.93 80.52,49.28 87.88,42.54 82.55,49.28 92.71,40.39
  pour Top (isolate 0.305): 68.58,58.17 93.98,58.17 93.98,32.77 68.58,32.77
  pour Bottom (isolate 0.305): 93.98,58.17 68.58,58.17 68.58,32.77 93.98,32.77
GND6  (via drill 0.38)
  other vias: 19.05,72.64 16.51,67.56 25.4,71.37 27.94,68.83 22.1,75.18 29.46,68.45 24.13,75.18 34.29,66.29
  pour Top (isolate 0.305): 10.16,84.07 35.56,84.07 35.56,58.67 10.16,58.67
  pour Bottom (isolate 0.305): 35.56,84.07 10.16,84.07 10.16,58.67 35.56,58.67
GND7  (via drill 0.38)
  other vias: 48.26,72.64 45.72,67.56 54.61,71.37 57.15,68.83 51.31,75.18 58.67,68.45 53.34,75.18 63.5,66.29
  pour Top (isolate 0.305): 39.37,84.07 64.77,84.07 64.77,58.67 39.37,58.67
  pour Bottom (isolate 0.305): 64.77,84.07 39.37,84.07 39.37,58.67 64.77,58.67
GND8  (via drill 0.38)
  other vias: 77.47,72.64 74.93,67.56 83.82,71.37 86.36,68.83 80.52,75.18 87.88,68.45 82.55,75.18 92.71,66.29
  pour Top (isolate 0.305): 68.58,84.07 93.98,84.07 93.98,58.67 68.58,58.67
  pour Bottom (isolate 0.305): 93.98,84.07 68.58,84.07 68.58,58.67 93.98,58.67
N$1
  Top 0.203: SJ2.3 R1.2
N$2
  Top 0.203: R2.2 SJ2.1
N$3
  Top 0.203: SJ1.3 R5.2
N$4
  Top 0.203: C2.1 19.9,14.9 20.32,14.48 21.59,14.48 22.35,15.24 22.35,16.26 22.06,16.55 U2.2
N$5
  Top 0.203: 28.03,26 27.94,25.91 27.94,24.07 C1.+ 28.3,24.3 R6.1
N$6
  Top 0.203: R8.2 SJ1.1
N$7
  Top 0.203: C6.1 49.11,14.9 49.53,14.48 50.8,14.48 51.56,15.24 51.56,16.26 51.27,16.55 U1.2
N$8
  Top 0.203: 57.24,26 57.15,25.91 57.15,24.07 C5.+ 57.51,24.3 R10.1
N$9
  Top 0.203: SJ3.3 R13.2
N$10
  Top 0.203: R14.2 SJ3.1
N$11
  Top 0.203: C10.1 78.32,14.9 78.74,14.48 80.01,14.48 80.77,15.24 80.77,16.26 80.48,16.55 U3.2
N$12
  Top 0.203: 86.45,26 86.36,25.91 86.36,24.07 C9.+ 86.72,24.3 R16.1
N$13
  Top 0.203: SJ4.3 R19.2
N$14
  Top 0.203: R20.2 SJ4.1
N$15
  Top 0.203: C14.1 19.9,40.81 20.32,40.39 21.59,40.39 22.35,41.15 22.35,42.16 22.06,42.46 U4.2
N$16
  Top 0.203: 28.03,51.9 27.94,51.82 27.94,49.98 C13.+ 28.3,50.2 R22.1
N$17
  Top 0.203: SJ5.3 R25.2
N$18
  Top 0.203: R26.2 SJ5.1
N$19
  Top 0.203: C18.1 49.11,40.81 49.53,40.39 50.8,40.39 51.56,41.15 51.56,42.16 51.27,42.46 U5.2
N$20
  Top 0.203: 57.24,51.9 57.15,51.82 57.15,49.98 C17.+ 57.51,50.2 R28.1
N$21
  Top 0.203: SJ6.3 R31.2
N$22
  Top 0.203: R32.2 SJ6.1
N$23
  Top 0.203: C22.1 78.32,40.81 78.74,40.39 80.01,40.39 80.77,41.15 80.77,42.16 80.48,42.46 U6.2
N$24
  Top 0.203: 86.45,51.9 86.36,51.82 86.36,49.98 C21.+ 86.72,50.2 R34.1
N$25
  Top 0.203: SJ7.3 R37.2
N$26
  Top 0.203: R38.2 SJ7.1
N$27
  Top 0.203: C26.1 19.9,66.71 20.32,66.29 21.59,66.29 22.35,67.06 22.35,68.07 22.06,68.36 U7.2
N$28
  Top 0.203: 28.03,77.81 27.94,77.72 27.94,75.89 C25.+ 28.3,76.11 R40.1
N$29
  Top 0.203: SJ8.3 R43.2
N$30
  Top 0.203: R44.2 SJ8.1
N$31
  Top 0.203: C30.1 49.11,66.71 49.53,66.29 50.8,66.29 51.56,67.06 51.56,68.07 51.27,68.36 U8.2
N$32
  Top 0.203: 57.24,77.81 57.15,77.72 57.15,75.89 C29.+ 57.51,76.11 R46.1
N$33
  Top 0.203: SJ9.3 R49.2
N$34
  Top 0.203: R50.2 SJ9.1
N$35
  Top 0.203: C34.1 78.32,66.71 78.74,66.29 80.01,66.29 80.77,67.06 80.77,68.07 80.48,68.36 U9.2
N$36
  Top 0.203: 86.45,77.81 86.36,77.72 86.36,75.89 C33.+ 86.72,76.11 R52.1
PSW  (via drill 0.38)
  Top 0.203: U2.8 v22.86,20.83 22.86,25.91 21.21,27.56 13.59,27.56 12.7,26.67 R7.1
  Bottom 0.203: J4.3 25.4,9.4 26.16,10.16 29.46,10.16 31.24,11.94 31.24,16.13 26.54,20.83 v22.86,20.83
PSW1  (via drill 0.38)
  Top 0.203: U1.8 v52.07,20.83 52.07,25.91 50.42,27.56 42.8,27.56 41.91,26.67 R12.1
  Bottom 0.203: J8.3 54.61,9.4 55.37,10.16 58.67,10.16 60.45,11.94 60.45,16.13 55.75,20.83 v52.07,20.83
PSW2  (via drill 0.38)
  Top 0.203: U3.8 v81.28,20.83 81.28,25.91 79.63,27.56 72.01,27.56 71.12,26.67 R18.1
  Bottom 0.203: J12.3 83.82,9.4 84.58,10.16 87.88,10.16 89.66,11.94 89.66,16.13 84.96,20.83 v81.28,20.83
PSW3  (via drill 0.38)
  Top 0.203: U4.8 v22.86,46.74 22.86,51.82 21.21,53.47 13.59,53.47 12.7,52.58 R24.1
  Bottom 0.203: J16.3 25.4,35.31 26.16,36.07 29.46,36.07 31.24,37.85 31.24,42.04 26.54,46.74 v22.86,46.74
PSW4  (via drill 0.38)
  Top 0.203: U5.8 v52.07,46.74 52.07,51.82 50.42,53.47 42.8,53.47 41.91,52.58 R30.1
  Bottom 0.203: J20.3 54.61,35.31 55.37,36.07 58.67,36.07 60.45,37.85 60.45,42.04 55.75,46.74 v52.07,46.74
PSW5  (via drill 0.38)
  Top 0.203: U6.8 v81.28,46.74 81.28,51.82 79.63,53.47 72.01,53.47 71.12,52.58 R36.1
  Bottom 0.203: J24.3 83.82,35.31 84.58,36.07 87.88,36.07 89.66,37.85 89.66,42.04 84.96,46.74 v81.28,46.74
PSW6  (via drill 0.38)
  Top 0.203: U7.8 v22.86,72.64 22.86,77.72 21.21,79.38 13.59,79.38 12.7,78.49 R42.1
  Bottom 0.203: J28.3 25.4,61.21 26.16,61.98 29.46,61.98 31.24,63.75 31.24,67.95 26.54,72.64 v22.86,72.64
PSW7  (via drill 0.38)
  Top 0.203: U8.8 v52.07,72.64 52.07,77.72 50.42,79.38 42.8,79.38 41.91,78.49 R48.1
  Bottom 0.203: J32.3 54.61,61.21 55.37,61.98 58.67,61.98 60.45,63.75 60.45,67.95 55.75,72.64 v52.07,72.64
PSW8  (via drill 0.38)
  Top 0.203: U9.8 v81.28,72.64 81.28,77.72 79.63,79.38 72.01,79.38 71.12,78.49 R54.1
  Bottom 0.203: J36.3 83.82,61.21 84.58,61.98 87.88,61.98 89.66,63.75 89.66,67.95 84.96,72.64 v81.28,72.64
SCL  (via drill 0.38)
  Top 0.203: U2.4 23.66,16.22 v24.13,15.75 | v17.14,17.02 16.11,18.06 J1.4 | J2.4 31.52,21.06 31.75,20.83 31.75,14.48 30.48,13.21 v29.21,13.21 R1.1
  Bottom 0.203: v17.14,17.02 22.86,17.02 v24.13,15.75 24.13,13.21 | 24.13,13.21 24.13,10.67 22.86,9.4 J3.4 | v29.21,13.21 24.13,13.21
SCL1  (via drill 0.38)
  Top 0.203: U1.4 52.87,16.22 v53.34,15.75 | v46.36,17.02 45.31,18.06 J5.4 | J6.4 60.73,21.06 60.96,20.83 60.96,14.48 59.69,13.21 v58.42,13.21 R5.1
  Bottom 0.203: v46.36,17.02 52.07,17.02 v53.34,15.75 53.34,13.21 | 53.34,13.21 53.34,10.67 52.07,9.4 J7.4 | v58.42,13.21 53.34,13.21
SCL2  (via drill 0.38)
  Top 0.203: U3.4 82.08,16.22 v82.55,15.75 | v75.56,17.02 74.52,18.06 J9.4 | J10.4 89.94,21.06 90.17,20.83 90.17,14.48 88.9,13.21 v87.63,13.21 R13.1
  Bottom 0.203: v75.56,17.02 81.28,17.02 v82.55,15.75 82.55,13.21 | 82.55,13.21 82.55,10.67 81.28,9.4 J11.4 | v87.63,13.21 82.55,13.21
SCL3  (via drill 0.38)
  Top 0.203: U4.4 23.66,42.13 v24.13,41.66 | v17.14,42.93 16.11,43.97 J13.4 | J14.4 31.52,46.97 31.75,46.74 31.75,40.39 30.48,39.12 v29.21,39.12 R19.1
  Bottom 0.203: v17.14,42.93 22.86,42.93 v24.13,41.66 24.13,39.12 | 24.13,39.12 24.13,36.58 22.86,35.31 J15.4 | v29.21,39.12 24.13,39.12
SCL4  (via drill 0.38)
  Top 0.203: U5.4 52.87,42.13 v53.34,41.66 | v46.36,42.93 45.31,43.97 J17.4 | J18.4 60.73,46.97 60.96,46.74 60.96,40.39 59.69,39.12 v58.42,39.12 R25.1
  Bottom 0.203: v46.36,42.93 52.07,42.93 v53.34,41.66 53.34,39.12 | 53.34,39.12 53.34,36.58 52.07,35.31 J19.4 | v58.42,39.12 53.34,39.12
SCL5  (via drill 0.38)
  Top 0.203: U6.4 82.08,42.13 v82.55,41.66 | v75.56,42.93 74.52,43.97 J21.4 | J22.4 89.94,46.97 90.17,46.74 90.17,40.39 88.9,39.12 v87.63,39.12 R31.1
  Bottom 0.203: v75.56,42.93 81.28,42.93 v82.55,41.66 82.55,39.12 | 82.55,39.12 82.55,36.58 81.28,35.31 J23.4 | v87.63,39.12 82.55,39.12
SCL6  (via drill 0.38)
  Top 0.203: U7.4 23.66,68.03 v24.13,67.56 | v17.14,68.83 16.11,69.87 J25.4 | J26.4 31.52,72.87 31.75,72.64 31.75,66.29 30.48,65.02 v29.21,65.02 R37.1
  Bottom 0.203: v17.14,68.83 22.86,68.83 v24.13,67.56 24.13,65.02 | 24.13,65.02 24.13,62.48 22.86,61.21 J27.4 | v29.21,65.02 24.13,65.02
SCL7  (via drill 0.38)
  Top 0.203: U8.4 52.87,68.03 v53.34,67.56 | v46.36,68.83 45.31,69.87 J29.4 | J30.4 60.73,72.87 60.96,72.64 60.96,66.29 59.69,65.02 v58.42,65.02 R43.1
  Bottom 0.203: v46.36,68.83 52.07,68.83 v53.34,67.56 53.34,65.02 | 53.34,65.02 53.34,62.48 52.07,61.21 J31.4 | v58.42,65.02 53.34,65.02
SCL8  (via drill 0.38)
  Top 0.203: U9.4 82.08,68.03 v82.55,67.56 | v75.56,68.83 74.52,69.87 J33.4 | J34.4 89.94,72.87 90.17,72.64 90.17,66.29 88.9,65.02 v87.63,65.02 R49.1
  Bottom 0.203: v75.56,68.83 81.28,68.83 v82.55,67.56 82.55,65.02 | 82.55,65.02 82.55,62.48 81.28,61.21 J35.4 | v87.63,65.02 82.55,65.02
SDA
  Top 0.203: J3.3 20.32,9.4 19.05,10.67 17.78,10.67 16.51,11.94 16.51,13.21 | 16.51,13.21 16.51,14.48 13.97,17.02 13.97,18.67 14.36,19.06 J1.3 17.01,19.06 17.78,18.29 25.15,18.29 | R2.1 16.51,13.21 | U2.5 24.46,16.56 24.64,16.38 24.89,16.38 25.15,16.64 25.15,18.29 | J2.3 29.07,20.06 27.3,18.29 25.15,18.29
SDA1
  Top 0.203: J7.3 49.53,9.4 48.26,10.67 46.99,10.67 45.72,11.94 45.72,13.21 | 45.72,13.21 45.72,14.48 43.18,17.02 43.18,18.67 43.57,19.06 J5.3 46.22,19.06 46.99,18.29 54.36,18.29 | R8.1 45.72,13.21 | U1.5 53.67,16.56 53.85,16.38 54.1,16.38 54.36,16.64 54.36,18.29 | J6.3 58.28,20.06 56.52,18.29 54.36,18.29
SDA2
  Top 0.203: J11.3 78.74,9.4 77.47,10.67 76.2,10.67 74.93,11.94 74.93,13.21 | 74.93,13.21 74.93,14.48 72.39,17.02 72.39,18.67 72.78,19.06 J9.3 75.43,19.06 76.2,18.29 83.57,18.29 | R14.1 74.93,13.21 | U3.5 82.88,16.56 83.06,16.38 83.31,16.38 83.57,16.64 83.57,18.29 | J10.3 87.49,20.06 85.72,18.29 83.57,18.29
SDA3
  Top 0.203: J15.3 20.32,35.31 19.05,36.58 17.78,36.58 16.51,37.85 16.51,39.12 | 16.51,39.12 16.51,40.39 13.97,42.93 13.97,44.58 14.36,44.97 J13.3 17.01,44.97 17.78,44.2 25.15,44.2 | R20.1 16.51,39.12 | U4.5 24.46,42.47 24.64,42.29 24.89,42.29 25.15,42.54 25.15,44.2 | J14.3 29.07,45.97 27.3,44.2 25.15,44.2
SDA4
  Top 0.203: J19.3 49.53,35.31 48.26,36.58 46.99,36.58 45.72,37.85 45.72,39.12 | 45.72,39.12 45.72,40.39 43.18,42.93 43.18,44.58 43.57,44.97 J17.3 46.22,44.97 46.99,44.2 54.36,44.2 | R26.1 45.72,39.12 | U5.5 53.67,42.47 53.85,42.29 54.1,42.29 54.36,42.54 54.36,44.2 | J18.3 58.28,45.97 56.52,44.2 54.36,44.2
SDA5
  Top 0.203: J23.3 78.74,35.31 77.47,36.58 76.2,36.58 74.93,37.85 74.93,39.12 | 74.93,39.12 74.93,40.39 72.39,42.93 72.39,44.58 72.78,44.97 J21.3 75.43,44.97 76.2,44.2 83.57,44.2 | R32.1 74.93,39.12 | U6.5 82.88,42.47 83.06,42.29 83.31,42.29 83.57,42.54 83.57,44.2 | J22.3 87.49,45.97 85.72,44.2 83.57,44.2
SDA6
  Top 0.203: J27.3 20.32,61.21 19.05,62.48 17.78,62.48 16.51,63.75 16.51,65.02 | 16.51,65.02 16.51,66.29 13.97,68.83 13.97,70.48 14.36,70.87 J25.3 17.01,70.87 17.78,70.1 25.15,70.1 | R38.1 16.51,65.02 | U7.5 24.46,68.38 24.64,68.2 24.89,68.2 25.15,68.45 25.15,70.1 | J26.3 29.07,71.87 27.3,70.1 25.15,70.1
SDA7
  Top 0.203: J31.3 49.53,61.21 48.26,62.48 46.99,62.48 45.72,63.75 45.72,65.02 | 45.72,65.02 45.72,66.29 43.18,68.83 43.18,70.48 43.57,70.87 J29.3 46.22,70.87 46.99,70.1 54.36,70.1 | R44.1 45.72,65.02 | U8.5 53.67,68.38 53.85,68.2 54.1,68.2 54.36,68.45 54.36,70.1 | J30.3 58.28,71.87 56.52,70.1 54.36,70.1
SDA8
  Top 0.203: J35.3 78.74,61.21 77.47,62.48 76.2,62.48 74.93,63.75 74.93,65.02 | 74.93,65.02 74.93,66.29 72.39,68.83 72.39,70.48 72.78,70.87 J33.3 75.43,70.87 76.2,70.1 83.57,70.1 | R50.1 74.93,65.02 | U9.5 82.88,68.38 83.06,68.2 83.31,68.2 83.57,68.45 83.57,70.1 | J34.3 87.49,71.87 85.72,70.1 83.57,70.1
VBACKUP
  Top 0.203: U2.7 23.66,20.36 24.13,20.83 26.67,20.83 | C3.1 26.67,20.83 | 26.67,20.83 26.67,26.8 27.05,27.18 30.23,27.18 30.48,26.92 R6.2
VBACKUP1
  Top 0.203: U1.7 52.87,20.36 53.34,20.83 55.88,20.83 | C7.1 55.88,20.83 | 55.88,20.83 55.88,26.8 56.26,27.18 59.44,27.18 59.69,26.92 R10.2
VBACKUP2
  Top 0.203: U3.7 82.08,20.36 82.55,20.83 85.09,20.83 | C11.1 85.09,20.83 | 85.09,20.83 85.09,26.8 85.47,27.18 88.65,27.18 88.9,26.92 R16.2
VBACKUP3
  Top 0.203: U4.7 23.66,46.27 24.13,46.74 26.67,46.74 | C15.1 26.67,46.74 | 26.67,46.74 26.67,52.7 27.05,53.09 30.23,53.09 30.48,52.83 R22.2
VBACKUP4
  Top 0.203: U5.7 52.87,46.27 53.34,46.74 55.88,46.74 | C19.1 55.88,46.74 | 55.88,46.74 55.88,52.7 56.26,53.09 59.44,53.09 59.69,52.83 R28.2
VBACKUP5
  Top 0.203: U6.7 82.08,46.27 82.55,46.74 85.09,46.74 | C23.1 85.09,46.74 | 85.09,46.74 85.09,52.7 85.47,53.09 88.65,53.09 88.9,52.83 R34.2
VBACKUP6
  Top 0.203: U7.7 23.66,72.17 24.13,72.64 26.67,72.64 | C27.1 26.67,72.64 | 26.67,72.64 26.67,78.61 27.05,78.99 30.23,78.99 30.48,78.74 R40.2
VBACKUP7
  Top 0.203: U8.7 52.87,72.17 53.34,72.64 55.88,72.64 | C31.1 55.88,72.64 | 55.88,72.64 55.88,78.61 56.26,78.99 59.44,78.99 59.69,78.74 R46.2
VBACKUP8
  Top 0.203: U9.7 82.08,72.17 82.55,72.64 85.09,72.64 | C35.1 85.09,72.64 | 85.09,72.64 85.09,78.61 85.47,78.99 88.65,78.99 88.9,78.74 R52.2

## Text on the board
Bottom: X01 | X01 | X01 | X01 | X01 | X01 | X01 | X01 | X01
Dimension: Route Out | Route Out | Route Out | Route Out | Route Out | Route Out | Route Out | Route Out | Route Out | Route Out | Route Out | Route Out
tPlace: Qwiic RTC Module | Qwiic RTC Module | Qwiic RTC Module | I2C | I2C | I2C | GND | 3.3V | SDA | SCL | PSW | !INT | !RST | GND | 3.3V | SDA | SCL | PSW | !INT | !RST | GND | 3.3V | SDA | SCL | PSW | !INT | !RST | Qwiic RTC Module | Qwiic RTC Module | Qwiic RTC Module | I2C | I2C | I2C | GND | 3.3V | SDA | SCL | PSW | !INT | !RST | GND | 3.3V | SDA | SCL | PSW | !INT | !RST | GND | 3.3V | SDA | SCL | PSW | !INT | !RST | Qwiic RTC Module | Qwiic RTC Module | Qwiic RTC Module | I2C | I2C | I2C | GND | 3.3V | SDA | SCL | PSW | !INT | !RST | GND | 3.3V | SDA | SCL | PSW | !INT | !RST | GND | 3.3V | SDA | SCL | PSW | !INT | !RST
bPlace: Qwiic RTC Module | Qwiic RTC Module | Qwiic RTC Module | GND | 3.3V | SDA | SCL | PSW | !INT | !RST | GND | 3.3V | SDA | SCL | PSW | !INT | !RST | GND | 3.3V | SDA | SCL | PSW | !INT | !RST | Qwiic RTC Module | Qwiic RTC Module | Qwiic RTC Module | GND | 3.3V | SDA | SCL | PSW | !INT | !RST | GND | 3.3V | SDA | SCL | PSW | !INT | !RST | GND | 3.3V | SDA | SCL | PSW | !INT | !RST | Qwiic RTC Module | Qwiic RTC Module | Qwiic RTC Module | GND | 3.3V | SDA | SCL | PSW | !INT | !RST | GND | 3.3V | SDA | SCL | PSW | !INT | !RST | GND | 3.3V | SDA | SCL | PSW | !INT | !RST